# EAGLE board maxTouch-EXT V1 (EAGLE 9.5.2)
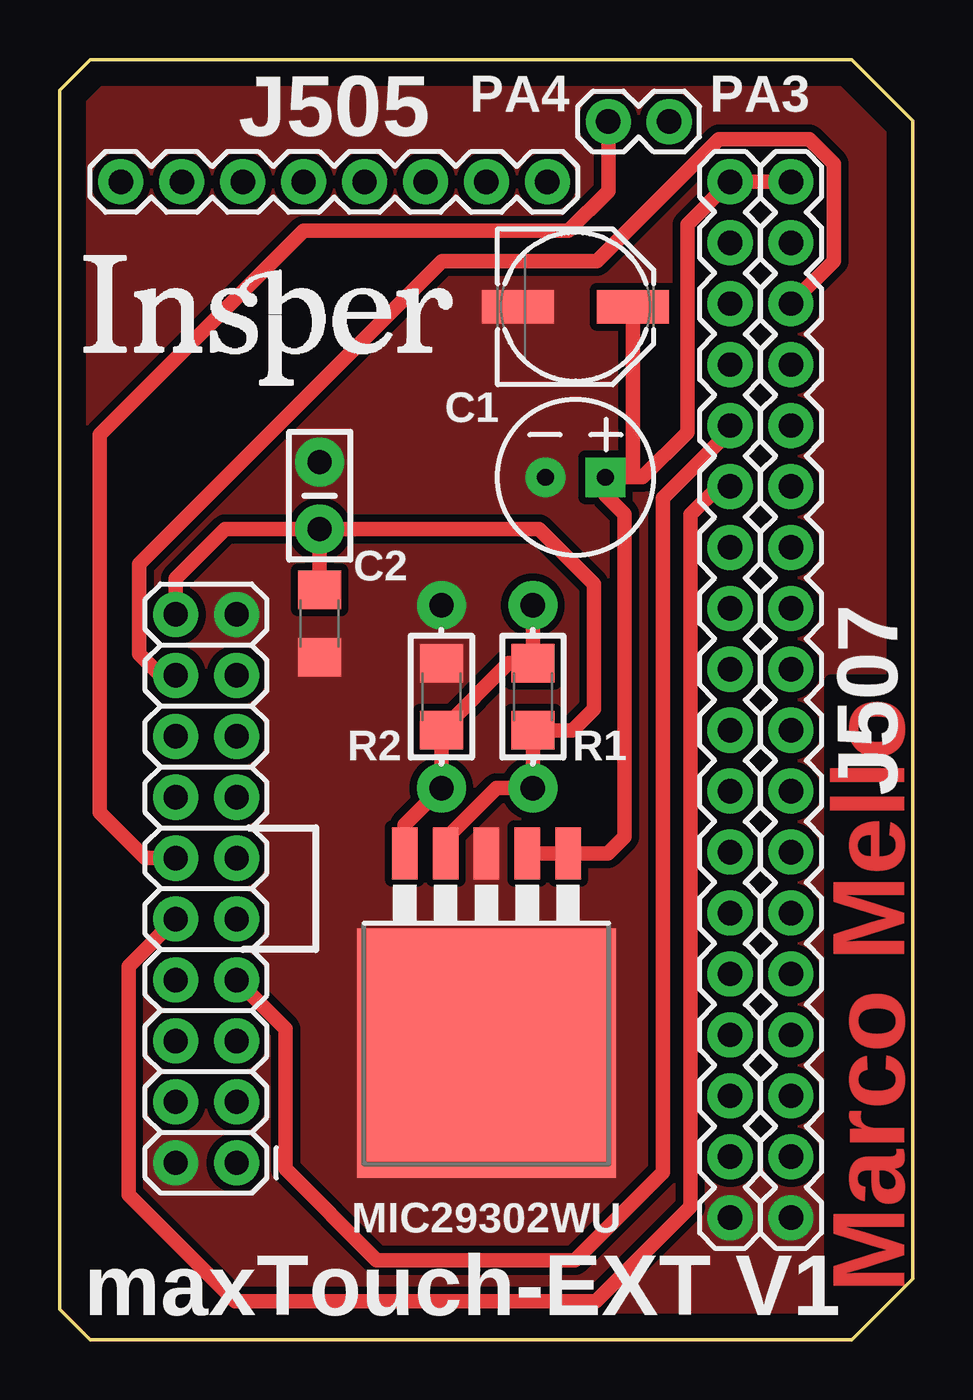
[diagram p0: board, top side]
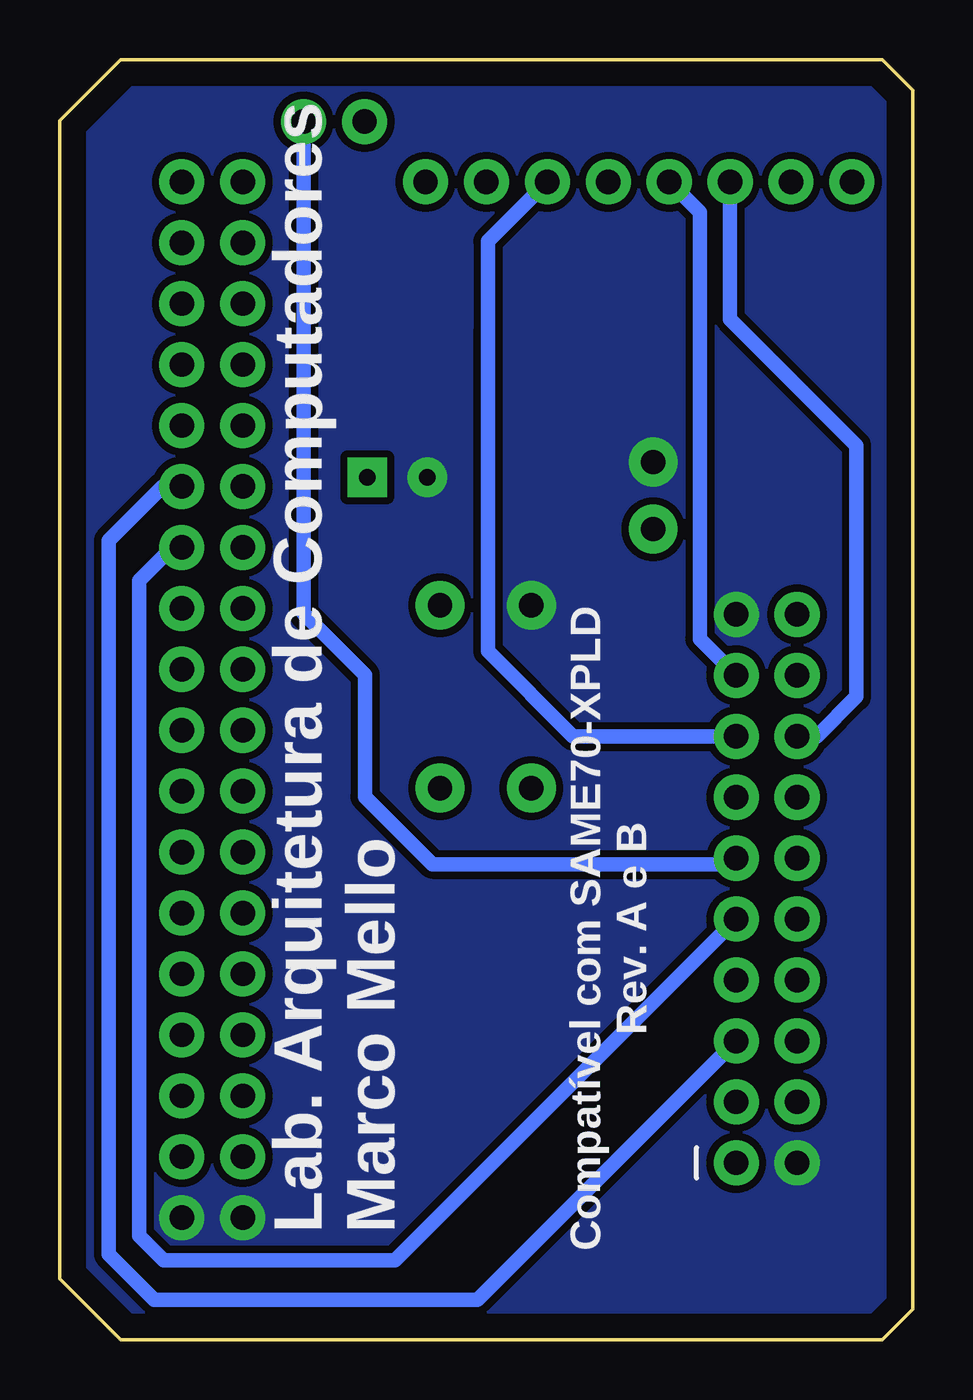
[diagram p1: board, bottom side, seen from below]

Size 35.56 x 53.34 mm. Coordinates in mm from the lower left corner, seen from the top.
Outline: 33.02,53.34 1.27,53.34 0,52.07 0,1.27 1.27,0 33.02,0 35.56,2.54 35.56,50.8 33.02,53.34
Copper layers (1*16): Top 0.035mm / dielectric 1.5mm / Bottom 0.035mm
Design rules "default": minimum track width 6mil, minimum drill 0.35mm, track to track 6mil, track to pad 6mil, pad to pad 6mil, via to via 6mil, smd to smd 6mil, copper to edge 40mil, drill to drill 6mil, minimum pad ring 10mil, minimum via ring 8mil, stop-mask expansion 4mil, vias tented up to drill 0mil, thermal gap 10mil

## Footprints (pad centres in the part's own frame; a part is rotated, then mirrored left to right if it is on the bottom)
PANASONIC_D = smd 3 x 1.4: + 2.4,0; - -2.4,0
1206 = smd 1.6 x 1.8: 1 -1.4,0; 2 1.4,0
CPOL-RADIAL-2.5MM-6.5MM = drill 0.7 pad 1.651 square: 1 1.25,0 | drill 0.7 pad 1.651: 2 -1.25,0
CAP-PTH-SMALL-KIT = drill 1.016 pad 2.032: 1 -1.397,0; 2 1.397,0
1X18 = drill 1.016 pad 1.88: 1 0,0; 2 2.54,0; 3 5.08,0; 4 7.62,0; 5 10.16,0; 6 12.7,0; 7 15.24,0; 8 17.78,0; 9 20.32,0; 10 22.86,0; 11 25.4,0; 12 27.94,0; 13 30.48,0; 14 33.02,0; 15 35.56,0; 16 38.1,0; 17 40.64,0; 18 43.18,0
1X08 = drill 1.016 pad 1.88: 1 0,0; 2 2.54,0; 3 5.08,0; 4 7.62,0; 5 10.16,0; 6 12.7,0; 7 15.24,0; 8 17.78,0
2X10 = drill 1.016 pad 1.88: 1 0,0; 2 0,2.54; 3 2.54,0; 4 2.54,2.54; 5 5.08,0; 6 5.08,2.54; 7 7.62,0; 8 7.62,2.54; 9 10.16,0; 10 10.16,2.54; 11 12.7,0; 12 12.7,2.54; 13 15.24,0; 14 15.24,2.54; 15 17.78,0; 16 17.78,2.54; 17 20.32,0; 18 20.32,2.54; 19 22.86,0; 20 22.86,2.54
1X02 = drill 1.016 pad 1.88: 1 0,0; 2 2.54,0
TO263-5 = smd 1.067 x 2.159: 1 -3.404,-5.791; 2 -1.702,-5.791; 3 0,-5.791; 4 1.702,-5.791; 5 3.404,-5.791 | smd 10.8 x 10.41: 6 0,2.54
AXIAL-0.3-KIT = drill 1.016 pad 2.032: P$1 -3.81,0; P$2 3.81,0

## Placement (x,y rotation side)
C1  100uF  [PANASONIC_D]  21.49,43.05 0 top
C2  10uF  [1206]  10.83,29.85 270 top
C3  100uF  [CPOL-RADIAL-2.5MM-6.5MM]  21.49,35.94 0 top
C4  0.1uF  [CAP-PTH-SMALL-KIT]  10.83,35.18 90 top
J1  [1X18]  30.48,5.08 90 top
J2  [1X18]  27.94,5.08 90 top
J3  [1X08]  20.32,48.26 180 top
J4  [2X10]  7.37,7.37 90 top
J5  [1X02]  25.4,50.77 180 top
MIC29302WU  MIC29502BT  [TO263-5]  17.78,14.48 180 top
R1  160R  [1206]  19.72,26.8 270 top
R2  100R  [1206]  15.91,26.8 270 top
R3  160R  [AXIAL-0.3-KIT]  19.72,26.8 270 top
R4  100R  [AXIAL-0.3-KIT]  15.91,26.8 270 top

## Library data of the parts
C1 = SparkFun-Capacitors; PROD_ID: CAP-12547
C2 = SparkFun-Capacitors
C3 = SparkFun-Capacitors; PROD_ID: CAP-08439
C4 = SparkFun-Capacitors; PROD_ID: CAP-08370
J1 J2 J4 J5 = SparkFun-Connectors
J3 = SparkFun-Connectors; PROD_ID: CONN-08438
MIC29302WU = stepper_drivers_etc
R1-R4 = SparkFun-Resistors

## Nets
3V3: C2.1 C4.1 J4.20 MIC29302WU.4 R1.2 R3.P$2
5V: C1.+ C3.1 J1.18 J2.18 MIC29302WU.1 MIC29302WU.2
CS: J3.3 J4.15
DCX: J1.13 J4.5
GND: C1.- C2.2 C3.2 C4.2 J1.1 J2.1 J4.2 J4.19 MIC29302WU.3 MIC29302WU.6 R2.1 R4.P$1
IRQ: J1.12 J4.9
MISO: J3.5 J4.17
MOSI: J3.6 J4.16
N$2: MIC29302WU.5 R1.1 R2.2 R3.P$1 R4.P$2
N$13: J4.1
N$14: J4.3
NC: J1.14
PD19: J2.15
PWM: J2.14 J4.7
RST: J2.13 J4.10
SCK: J1.16 J4.18
SCL: J4.12 J5.2
SDA: J4.11 J5.1

## Tracks (layer width: path | path; a pad name or v marks a point on that pad's centre or on a via)
3V3
  Top 0.61: C4.1 19.97,33.78 22.26,31.5 22.26,26.29 21.36,25.4 R1.2 R3.P$2 18.19,22.99 16.08,20.87 MIC29302WU.4 | J4.20 4.83,31.72 6.89,33.78 C4.1 | C2.1 C4.1
5V
  Top 0.6: J2.18 J1.18
  Top 0.61: MIC29302WU.2 MIC29302WU.1 22.84,20.27 23.53,20.96 23.53,34.42 22.74,35.2 C3.1 23.89,35.94 | J2.18 26.16,46.48 26.16,37.82 24.29,35.94 23.89,35.94 | C1.+ 23.89,35.94
CS
  Bottom 0.6: 17.72,28.7 14.16,25.15 J4.15 | J3.3 17.72,45.78 17.72,42.04
  Bottom 0.61: 17.72,28.7 17.72,42.04
DCX
  Bottom 0.61: J4.5 18.16,1.65 31.62,1.65 33.53,3.56 33.53,33.3 31.27,35.56 J1.13
GND
  pour Bottom (isolate 0.305, no thermals): 0,1.27 1.27,0 33.02,0 35.56,2.54 35.56,50.8 33.02,53.34 1.27,53.34 0,52.07
  pour Top (isolate 0.305, no thermals): 0,1.27 1.27,0 33.02,0 35.56,2.54 35.56,50.8 33.02,53.34 1.27,53.34 0,52.07
IRQ
  Bottom 0.61: J1.12 30.89,33.02 32.26,31.65 32.26,4.32 31.24,3.3 21.59,3.3 J4.9
MISO
  Bottom 0.6: J4.17 8.89,29.21 8.89,46.99 J3.5
MOSI
  Bottom 0.6: J4.16 4,25.15 2.35,26.8 2.35,37.27 7.62,42.55 J3.6
N$2
  Top 0.61: R3.P$1 R1.1 18.71,28.2 R2.2 R4.P$2 14.38,21.46 MIC29302WU.5
PWM
  Top 0.61: J4.7 9.4,12.95 9.4,7.11 13.21,3.3 21.47,3.3 25.15,6.98 25.15,35.08 27.94,37.87 J2.14
RST
  Top 0.6: J4.10 2.86,15.56 2.86,6.03 7.3,1.59 22.35,1.59 26.29,5.52 26.29,30.76
  Top 0.61: J2.13 27.46,35.56 26.29,34.39 26.29,30.76
SCK
  Top 0.61: J1.16 32.26,44.96 32.26,49.02 31.24,50.04 27.46,50.04 22.38,44.96 15.93,44.96 3.3,32.33 3.3,28.57 4.19,27.69 J4.18
SCL
  Top 0.61: J4.12 3.56,20.07 1.65,21.97 1.65,37.72 10.16,46.23 21.21,46.23 22.86,47.88 J5.2
SDA
  Bottom 0.6: J4.11 7.62,19.81 20.03,19.81 22.84,22.62 22.84,27.7
  Bottom 0.61: 22.84,27.7 25.4,30.26 J5.1

## Text on the board
Top: Marco Mello
tPlace: PA4 | PA3 | J505 | J507 | maxTouch-EXT V1
bPlace: Compatível com SAME70-XPLD / Rev. A e B | Lab. Arquitetura de Computadores / Marco Mello